# Altium PCB АСТА.758725.047_V2.PcbDoc (part 2 of 3)
Units mm, origin at the board's own origin, x right, y up, seen from the top; angles counter-clockwise.
Board outline 310 x 80 mm, 2 copper layers (Top Layer, Top, Bottom Layer, Bottom); 261 components, 259 nets, 994 pads, 414 vias.
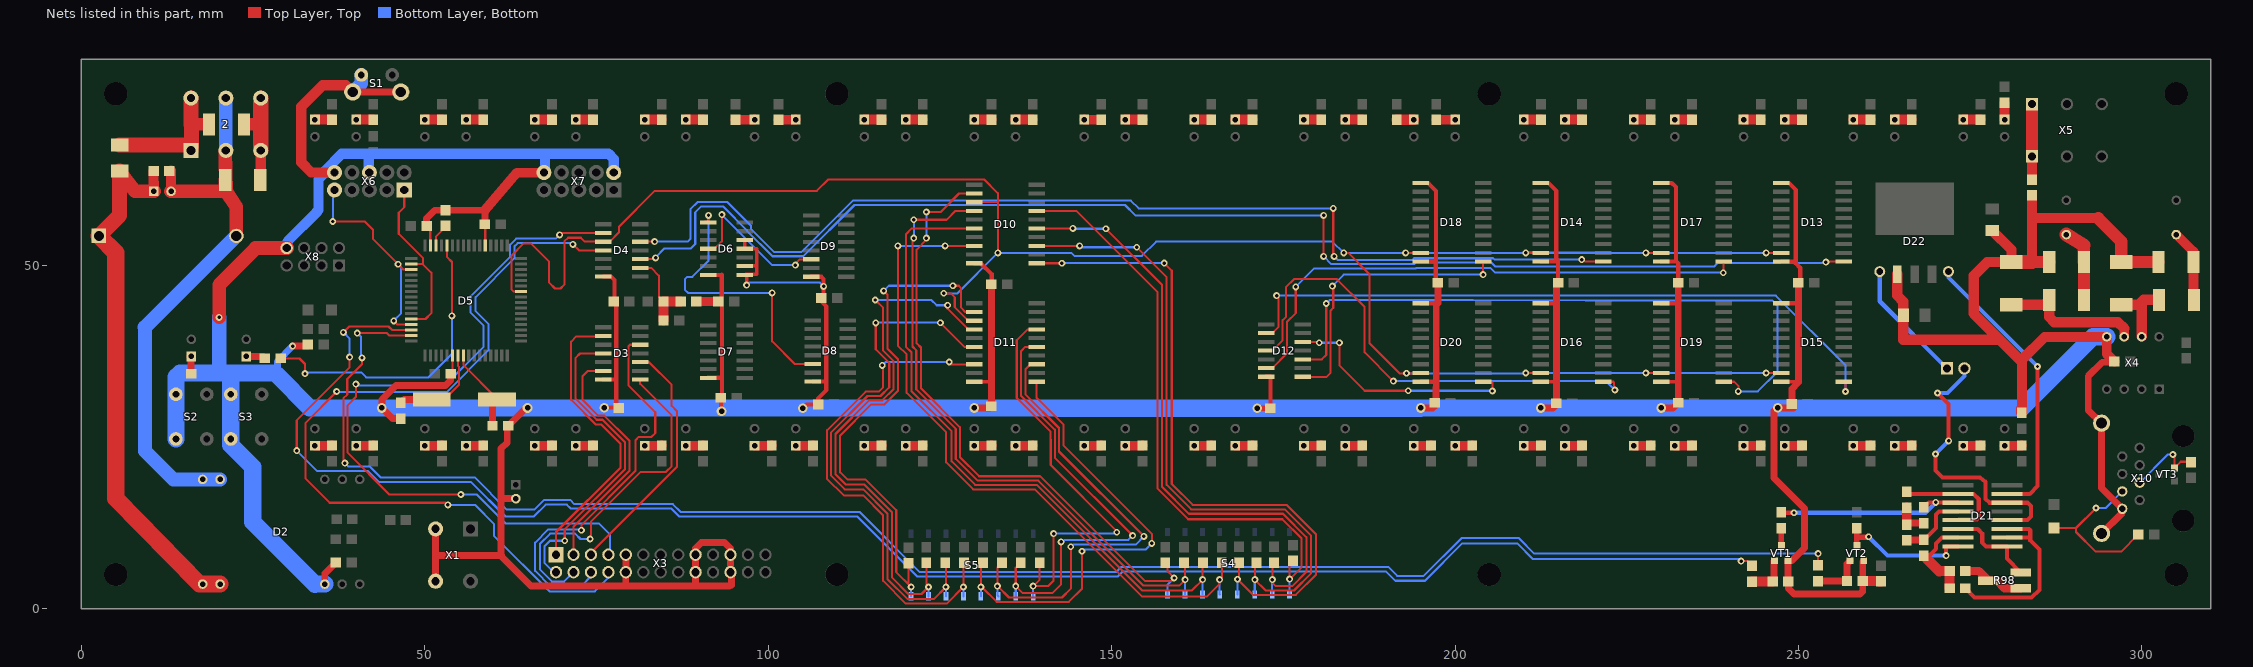
[diagram p2: the nets of this part, all layers, seen from the top]

## Via types
v1: diameter 1, hole 0.5, Top Layer, Top to Bottom Layer, Bottom, 391 vias
v2: diameter 1.016, hole 0.457, Top Layer, Top to Bottom Layer, Bottom, 12 vias
v3: diameter 1.4, hole 0.8, Top Layer, Top to Bottom Layer, Bottom, 11 vias

## Nets (pads, with @x,y where several pads share a name; then routed paths per layer and width w, separated by ;. In a path a pad name is that pad's centre, name@x,y a point inside that pad or via, vN(x,y) a via of type N, cw(c..) or ccw(c..) an arc to the next point about the centre after c; other vN are vias at no path point) (continued)
D7: D4.3 D5.42 D10.3 D11.3 D13.9 D14.9 D15.9 D16.9 D17.9 D18.9 D19.9 D20.9 | length 329.8
  Top Layer, Top w0.3: D5.42@64,46.2 62.92,46.2 62.64,46.48 62.64,51.459 64.405,53.224 65.421,53.224 68.088,50.557 68.088,47.512 68.95,46.65 69.75,46.65 70.32,47.22 70.32,53.5 70.86,54.04 72.72,54.04 73.3,53.46 D4.3@76,53.46 76.9,53.46 78.27,54.83 78.27,55.65 83.48,60.86 107.077,60.86 108.727,62.51 131.45,62.51 133.44,60.52 133.44,59.25 ; v1(125.56,45.95) 126.555,45.95 127.155,45.35 127.155,43.925 128.48,42.6 128.48,42.58 129.1,41.96 D11.3@130,41.96 ; D10.3@130,59.21 130.04,59.25 133.44,59.25 ; v1(133.44,51.84) 133.44,59.25 ; v1(183.785,51.827) 184.42,51.827 187.539,48.708 187.539,38.675 191.913,34.301 v1(192.929,34.301) 194.961,34.301 D20.9@195,34.34 ; v1(192.79,51.84) D18.9@195,51.84 ; v1(210.29,34.34) D16.9@212.5,34.34 ; v1(210.29,51.84) D14.9@212.5,51.84 ; v1(227.79,34.34) D19.9@230,34.34 ; v1(227.79,51.84) D17.9@230,51.84 ; v1(245.29,34.34) D15.9@247.5,34.34 ; v1(245.29,51.84) D13.9@247.5,51.84
  Bottom Layer, Bottom w0.3: v1(125.56,45.95) 125.57,45.94 127.55,45.94 127.55,45.95 v1(133.44,51.84) 144.11,51.84 144.56,51.39 154.39,51.39 156.472,53.472 182.14,53.472 v1(183.785,51.827) 192.777,51.827 v1(192.79,51.84) v1(210.29,51.84) 210.3,51.85 222.65,51.85 222.65,51.84 v1(227.79,51.84) v1(245.29,51.84) ; v1(192.929,34.301) 210.251,34.301 v1(210.29,34.34) v1(227.79,34.34) v1(245.29,34.34)
DE0: D3.2 X3.1 | length 43.4
  Top Layer, Top w0.3: X3.1@69.104,7.885 69.104,11.187 78.502,20.585 78.502,24.014 75.666,26.85 74.861,26.85 71.29,30.421 71.29,38.9 72.06,39.67 75.94,39.67 D3.2@76,39.73
DE1: D3.4 X3.2 | length 46
  Top Layer, Top w0.3: v1(70.374,9.917) 70.374,11.568 79.137,20.331 79.137,24.268 75.865,27.54 75.026,27.54 71.95,30.616 71.95,36.55 72.59,37.19 D3.4@76,37.19
  Bottom Layer, Bottom w0.3: X3.2@69.104,5.345 68.755,5.345 67.45,6.65 67.45,9.15 68.217,9.917 v1(70.374,9.917)
DE2: D3.6 X3.3 | length 36.1
  Top Layer, Top w0.3: X3.3@71.644,7.885 71.644,11.949 79.772,20.077 79.772,24.522 76.149,28.145 75.276,28.145 72.95,30.471 72.95,33.85 73.75,34.65 D3.6@76,34.65
DE3: D3.8 X3.4 | length 50.6
  Top Layer, Top w0.3: v1(74.057,10.171) 74.184,10.044 74.184,12.711 81.423,19.95 85.106,19.95 85.928,20.772 85.928,28.172 81.338,32.762 D3.8@81.338,33.38
  Bottom Layer, Bottom w0.3: X3.4@71.644,5.345 70.249,3.95 68.55,3.95 66.75,5.75 66.75,9.45 68.25,10.95 71.881,10.95 72.66,10.171 v1(74.057,10.171)
DE4: D3.10 X3.5 | length 36.2
  Top Layer, Top w0.3: X3.5@74.184,7.885 74.184,8.134 86.72,20.67 86.72,28.76 85.93,29.55 85.93,32.63 82.64,35.92 D3.10@81.338,35.92
DE5: D3.12 X3.6 | length 57.7
  Top Layer, Top w0.3: v1(72.787,11.441) 72.787,12.203 80.67,20.086 80.67,24.56 81.16,25.05 83,25.05 83.55,25.6 83.55,28.63 79.63,32.55 79.63,37.65 79.65,37.67 79.65,38.25 79.86,38.46 D3.12@81.338,38.46
  Bottom Layer, Bottom w0.3: v1(72.787,11.441) 72.66,11.568 67.968,11.568 66.05,9.65 66.05,5.55 68.287,3.313 72.787,3.313 74.184,4.71 X3.6@74.184,5.345
DE6: D4.2 X3.7 | length 110.1
  Top Layer, Top w0.3: v1(39.96,32.73) 39.96,30.85 38.75,29.64 38.75,22.744 44.844,16.65 v1(55.25,16.65) ; v1(69.62,54.46) 69.89,54.73 D4.2@76,54.73
  Bottom Layer, Bottom w0.3: v1(39.96,32.73) 40.34,32.73 40.34,32.5 52.86,32.5 58.55,38.19 58.55,41.25 56.67,43.13 56.67,45.52 62.43,51.28 62.43,53.03 63.3,53.9 69.06,53.9 v1(69.62,54.46) ; v1(55.25,16.65) 57.55,16.65 61.743,12.457 75.327,12.457 76.978,10.806 76.978,8.139 X3.7@76.724,7.885
DE7: D4.4 X3.8 | length 124.6
  Top Layer, Top w0.3: v1(37.15,31.65) 32.599,27.05 32.599,19.001 36.15,15.45 53.05,15.45 v1(53.35,15.15) ; v1(71.56,53.08) 72.45,52.19 D4.4@76,52.19
  Bottom Layer, Bottom w0.3: v1(37.15,31.65) 37.46,31.65 37.54,31.57 53.17,31.57 59.25,37.65 59.25,41.49 57.39,43.35 57.39,45.38 63.04,51.03 63.04,52.76 63.53,53.25 71.39,53.25 v1(71.56,53.08) ; v1(53.35,15.15) 57.3,15.15 60.1,12.35 60.1,10.6 68.15,2.55 74.75,2.55 76.724,4.524 X3.8@76.724,5.345
ES1: D5.14 R92.1 | length 256.6
  Top Layer, Top w0.3: v1(31.35,23.05) 31.35,27.46 39.05,35.16 v1(39.05,36.65) ; v1(38.15,40.25) 39.014,41.114 44.714,41.114 45.228,40.6 D5.14@48,40.6 ; v1(241.65,6.95) 242.55,6.95 R92.1@243.25,6.25
  Bottom Layer, Bottom w0.3: v1(31.35,23.05) 34.35,20.05 41.75,20.05 43.35,18.45 56.75,18.45 61.75,13.45 65.85,13.45 67.589,15.189 70.689,15.189 71.263,14.616 85.868,14.616 87.011,13.473 112.919,13.473 121.682,4.71 150.892,4.71 151.654,5.472 189.928,5.472 191.3,4.1 195.621,4.1 201.057,9.536 209.064,9.536 211.35,7.25 241.35,7.25 v1(241.65,6.95) ; v1(38.15,40.25) 39.05,39.35 v1(39.05,36.65)
ES2: D5.15 R100.2 | length 256.4
  Top Layer, Top w0.3: v1(38.37,21.22) 38.14,21.45 38.14,30.64 38.7,31.2 38.7,33.47 40.85,35.62 v1(40.85,36.55) ; v1(40.15,40.15) 44.497,40.15 44.847,39.8 D5.15@48,39.8 ; R100.2@252.85,6.336 v1(252.85,8.05)
  Bottom Layer, Bottom w0.3: v1(38.37,21.22) 38.84,20.75 41.95,20.75 43.55,19.15 57.25,19.15 61.95,14.45 65.95,14.45 67.361,15.861 71.161,15.861 71.771,15.251 86.122,15.251 87.265,14.108 113.3,14.108 122.063,5.345 150.638,5.345 151.4,6.107 190.262,6.107 191.569,4.8 195.432,4.8 200.93,10.298 209.302,10.298 211.55,8.05 v1(252.85,8.05) ; v1(40.15,40.15) 40.7,39.6 40.7,36.7 v1(40.85,36.55)
G: D5.60 R9.1 | length 44.6
  Top Layer, Top w0.3: R9.1@29,36.5 29.05,36.45 31.75,36.45 32.55,35.65 v1(32.55,34.25) ; D5.60@53.2,52.9 53.2,51.25 53.95,50.5 v1(53.95,42.65)
  Bottom Layer, Bottom w0.3: v1(32.55,34.25) 32.745,34.445 40.745,34.445 41.47,33.72 50.53,33.72 53.95,37.14 v1(53.95,42.65)
GND: C1.2 C6.2 C7.1 C8.2 C9.1 C10.2 C11.2 C12.1 C13.1 C14.1 C15.2 C16.1 C17.1 C18.1 C19.2 C20.1 C21.1 C22.1 C23.1 C24.1 C25.1 C26.1 C27.1 C28.1 C29.1 C30.1 C31.1 C32.1 C33.1 C37.1 C38.1 C39.1 D2.16 D3.7 D4.7 D5.22 D5.53 D5.63 D6.7 D6.8 D6.9 D6.11 D6.12 D7.7 D8.8 D9.8 D10.10 D11.10 D12.7 D13.1 D13.10 D14.1 D14.10 D15.1 D15.10 D16.1 D16.10 D17.1 D17.10 D18.1 D18.10 D19.1 D19.10 D20.1 D20.10 D22.1 R5.2 R93.2 R99.1 RU1.2 RU2.1 S1.1 S1.3 S1.4 S2.3 S2.4 S3.3 S3.4 VD3.1 VD4.1 VT1.2 VT2.2 X1.2 X1.3 X3.9 X3.10 X3.17 X3.18 X3.21 X3.22 X4.5 X6.6 X6.10 X7.2 X7.10 X8.8 X10.1 X10.11 X10.12 | length 1128.1
  Top Layer, Top w0.3: C1.2@32.964,38.25 C1.2@32.964,38.5 ; C14.1@53.75,34.25 54,34.5 D5.22@54,36.9
  Top Layer, Top w0.4: C16.1@50.25,55.75 50.8,55.2 D5.63@50.8,52.9 ; C17.1@58.75,56 58.8,56 D5.53@58.8,52.9
  Top Layer, Top w0.5: D6.12@96.588,53.71 D6.11@96.588,52.44 98.34,52.44 ; D6.9@96.61,49.922 96.638,49.95 98.35,49.95 ; v1(96.85,47.15) 96.85,48.368 D6.8@96.588,48.63 96.708,48.75 98.35,48.75 98.35,49.95 ; 98.35,52.45 98.35,49.95
  Top Layer, Top w0.508: D11.10@130,33.07 132.422,33.07 ; 132.5,33.148 132.422,33.07 ; 132.522,33.07 132.422,33.07 ; D16.10@212.5,33.07 214.73,33.07 214.75,33.05 ; D19.10@230,33.07 232.48,33.07 232.5,33.05 ; D15.10@247.5,33.07 249.93,33.07 250,33
  Top Layer, Top w0.6: D3.7@75.962,33.412 D3.7@75.968,33.412 ; D3.7@76,33.38 D3.7@75.968,33.412 ; D4.7@76,48.38 77.12,48.38 77.6,47.9 77.6,44.85 C13.1@77.5,44.75 77.867,44.383 77.867,33.412 ; v3(76.1,29.3) 78.1,29.3 C12.1@78.15,29.35 ; C12.1@77.972,29.25 C12.1@78.25,29.25 C12.1@78.15,29.35 ; D7.7@91.25,33.63 91.25,33.65 93.25,33.65 ; D6.7@91.25,48.63 93.212,48.63 93.234,48.652 C18.1@93.234,44.75 ; C18.1@92.75,44.75 C18.1@93.199,44.75 ; C20.1@93.15,30.7 C20.1@93.2,30.75 ; v3(93.2,28.8) 93.1,28.9 C20.1@93.1,30.75 C20.1@93.2,30.75 ; v3(105,29.2) 105.55,29.75 C21.1@107.25,29.75 107.25,30.65 108.45,31.85 108.45,33.15 ; D9.8@106.25,48.36 106.25,48.35 107.75,48.35 108.05,48.05 v1(108.05,46.95) 108.05,45.35 107.85,45.35 C22.1@107.75,45.25 107.75,44.75 108.45,44.05 108.45,33.15 ; D8.8@106.5,33.11 108.41,33.11 108.45,33.15 ; D10.10@130,50.32 130.93,50.32 132.5,48.75 132.55,48.75 132.55,47.25 C23.1@132.5,47.25 ; D12.7@172.482,33.793 173.117,33.793 C33.1@173.117,29.221 ; D20.10@195,33.07 196.971,33.07 ; D20.1@195,44.5 197.5,44.5 ; D18.10@195,50.57 197.18,50.57 ; D18.1@195,62 196.09,62 197.25,60.84 197.25,50.5 197.18,50.57 ; C30.1@197.5,47.5 197.18,47.82 197.18,50.57 ; D16.1@212.5,44.5 214.75,44.5 ; D14.10@212.5,50.57 214.88,50.57 215,50.45 ; D14.1@212.5,62 213.59,62 214.74,60.85 214.74,51.01 215,50.75 215,50.45 ; C26.1@215,47.5 215,50.45 ; D19.1@230,44.5 232.5,44.5 ; D17.10@230,50.57 232.23,50.57 ; D17.1@230,62 231.55,62 232.15,61.4 232.15,50.65 232.23,50.57 ; C29.1@232.5,47.5 232.5,50.3 232.23,50.57 ; D15.1@247.5,44.5 250,44.5 ; D13.10@247.5,50.57 247.53,50.57 247.55,50.55 249.35,50.55 249.35,50.57 249.61,50.31 ; D13.1@247.5,62 248.59,62 249.61,60.98 249.61,50.31 ; C25.1@250,47.5 250.25,47.75 250.25,49.67 249.61,50.31 ; 282.537,35.963 282.537,36.284 ; D3.7@75.968,33.412 77.867,33.412 ; 77.867,33.412 77.867,29.633 C12.1@78.15,29.35 ; C18.1@93.199,44.75 93.234,44.715 C18.1@93.234,44.75 ; C18.1@93.199,44.75 C18.1@93.234,44.75 ; C20.1@93.2,30.75 93.25,30.75 93.25,33.65 ; C18.1@93.234,44.75 93.25,44.75 93.25,33.65 ; D6.9@96.588,49.9 96.61,49.922 97.425,49.922 97.403,49.9 D6.9@96.588,49.9
  Top Layer, Top w0.7: 196.971,33.07 197.01,33.031 197.26,33.031
  Top Layer, Top w0.8: v3(171.212,29.221) C33.1@173.117,29.221
  Top Layer, Top w1: v1(30.75,38.25) C1.2@32.964,38.25 ; D2.16@35.43,3.61 35.43,5.13 C9.1@37.05,6.75 ; S1.4@39.5,75.25 S1.3@46.5,75.25 ; C11.2@46.5,27.714 45.286,27.714 v3(43.75,29.25) 43.75,30.45 45.8,32.5 53,32.5 53.75,33.25 C14.1@53.75,34.25 ; C16.1@50.25,55.75 50.25,56.85 51.436,58.036 C19.2@53,58.036 58.736,58.036 58.736,56.014 C17.1@58.75,56 ; X1.3@51.57,4.03 51.55,4.05 51.55,7.75 ; X1.2@51.57,11.65 51.55,11.65 51.55,7.75 ; 61.15,7.8 61.1,7.8 ; C8.2@63.25,16.05 61.1,16.05 ; v3(64.95,29.25) 64.736,29.25 C10.2@62.136,26.65 62,26.514 62,24.25 61.1,23.35 61.1,16.05 ; X3.9@79.264,7.885 X3.10@79.264,5.345 79.25,5.331 79.25,3.35 ; 89.35,3.55 89.424,3.624 X3.18@89.424,5.345 X3.17@89.424,7.885 89.424,8.824 90.25,9.65 93.65,9.65 94.504,8.796 X3.21@94.504,7.885 X3.22@94.504,5.345 94.65,5.199 94.65,3.45 94.55,3.55 94.35,3.35 79.25,3.35 ; v3(130,29.25) 132.25,29.25 C24.1@132.5,29.5 132.522,29.522 132.522,33.07 ; 132.5,33.148 C23.1@132.5,47.25 ; v3(195,29.25) 196.75,29.25 197.05,29.55 C32.1@197.05,30 197.25,30.2 197.25,32.25 197.26,32.26 197.26,33.031 197.26,44.26 197.5,44.5 C30.1@197.5,47.5 ; v3(212.5,29.25) 214.25,29.25 214.75,29.75 C28.1@214.75,29.95 214.75,33.05 214.75,44.5 214.75,47.25 C26.1@215,47.5 ; v3(230,29.25) 231.75,29.25 C31.1@232.5,30 232.5,33.05 232.5,44.5 C29.1@232.5,47.5 ; C25.1@250,47.5 250,44.5 250,33 249.05,32.05 C27.1@249.05,29.85 249.05,29.45 249.25,29.25 246.85,29.25 246.44,28.84 246.44,19.04 250.86,14.62 250.86,8.86 249,7 VT1.2@248.5,7 248.5,4.036 R93.2@248.536,4 248.536,2.964 249.35,2.15 258.95,2.15 259.35,2.55 R99.1@259.35,4.05 259.35,6.85 VT2.2@259.5,7 ; 279.178,39.322 279.362,39.205 279.295,39.205 ; X10.11@294.132,10.987 297.142,13.997 X10.1@297.142,14.567 294.094,17.615 294.094,27.013 X10.12@294.132,27.037 292.189,28.98 292.189,33.871 294.221,35.903 295.999,35.903 C7.1@296,36 ; 51.55,7.75 61.05,7.75 ; 61.05,7.75 61.1,7.8 ; 61.05,7.75 65.45,3.35 79.25,3.35 ; 61.1,7.8 61.1,16.05
  Top Layer, Top w1.3: C15.2@89.536,44.75 C18.1@92.75,44.75
  Top Layer, Top w1.4: X4.5@294.856,39.586 294.856,39.596 X4.5@294.88,39.62
  Top Layer, Top w1.422: 58.75,58.05 63.39,63.5 67.3,63.5 X7.10@67.34,63.54 ; R99.1@259.35,4.05 261.7,4.05 261.75,4 C37.1@262,4 ; C6.2@282.41,28.79 282.5,28.7 282.537,28.737 282.537,29.299 ; 284,56.77 R5.2@284,60.214 ; 284.008,56.25 284.008,56.758 284.01,56.76 284.01,56.923 ; X4.5@294.88,39.62 294.88,37.12 C7.1@296,36
  Top Layer, Top w1.5: X6.10@36.84,63.54 33.46,63.54 32,65 32,73.12 35.13,76.25 38.5,76.25 S1.4@39.5,75.25 ; D22.1@264.376,48.73 264.376,45.624 265.265,44.735 C38.1@265.265,42.761 265.265,39.205 279.295,39.205 ; C39.1@278.219,55.08 281.013,52.286 281.013,50.508 VD4.1@281,50.5 277.5,50.5 275.5,48.5 275.5,43 279.178,39.322 279.295,39.205 ; C6.2@282.5,28.536 282.41,28.626 282.41,28.79 282.41,29.172 282.537,29.299 282.537,35.963 279.295,39.205 ; 282.537,36.284 285.839,39.586 X4.5@294.856,39.586 ; 284,56.77 284.01,56.76 ; 284.008,50.5 284.008,56.25 ; 284.01,56.923 293.65,56.923 293.65,56.85
  Top Layer, Top w1.778: 284.008,50.5 RU2.1@286.5,50.5 ; VD3.1@297,50.5 RU1.2@302.42,50.5
  Top Layer, Top w1.8: X8.8@29.88,52.54 29.94,52.54 X8.8@29.95,52.55 ; 293.65,56.85 297,53.5 VD3.1@297,50.5
  Top Layer, Top w2: v1(20.05,42.45) 20.05,47.15 25.35,52.45 25.35,52.55 X8.8@29.95,52.55 ; VD4.1@281,50.5 284.008,50.5
  Bottom Layer, Bottom w0.3: v1(96.85,47.15) 97.22,47.52 107.48,47.52 v1(108.05,46.95)
  Bottom Layer, Bottom w1: 28.545,34.003 28.545,36.045 v1(30.75,38.25)
  Bottom Layer, Bottom w1.4: v3(76.1,29.3) 76.5,29.3 v3@76.55,29.25
  Bottom Layer, Bottom w1.5: X8.8@29.88,52.54 29.96,52.54 30,52.5 30,53.5 34.25,57.75 34.25,57.84 34.52,58.11 34.52,62.52 35.54,63.54 ; X6.10@36.84,63.54 35.54,63.54 ; X6.6@41.92,63.54 41.85,63.61 41.85,66.25 ; X7.10@67.34,63.54 67.5,63.7 67.5,66.25 ; X7.2@77.5,63.54 X7.2@77.486,63.526 ; 35.54,63.54 35.54,63.873 37.917,66.25 41.85,66.25 ; 41.85,66.25 67.5,66.25 ; 67.5,66.25 76.75,66.25 77.5,65.5 X7.2@77.486,63.526 ; X7.2@77.486,63.526 77.486,63.511 X7.2@77.486,63.526
  Bottom Layer, Bottom w2: S3.3@21.65,31.35 S3.3@21.75,31.25 S3.3@21.75,31.45 ; S1.4@39.5,75.25 40.75,76.5 S1.1@40.75,77.75
  Bottom Layer, Bottom w2.1: 20.05,34.35 v1(20.05,42.45)
  Bottom Layer, Bottom w2.5: S2.4@13.75,24.75 13.75,33.75 14.35,34.35 20.05,34.35 21.75,34.35 ; S3.3@21.75,31.25 S3.4@21.75,24.75 21.75,23.85 24.95,20.65 24.95,12.85 25.05,12.75 24.95,12.65 34.011,3.589 D2.16@35.43,3.61 ; S3.3@21.75,31.45 21.75,34.35 ; 28.545,34.003 33.25,29.25 v3(43.75,29.25) v3(64.95,29.25) 76.55,29.25 v3(130,29.25) 137.72,29.25 137.73,29.24 142.24,29.24 142.25,29.25 142.279,29.221 v3(171.212,29.221) 194.971,29.221 v3(195,29.25) v3(212.5,29.25) v3(230,29.25) 282.5,29.25 292.87,39.62 X4.5@294.88,39.62 ; 28.544,34.004 28.25,34.25 28.15,34.35 21.75,34.35
  other v3: 247,29.3
GND_P: 2.3 2.4 C2.1 C3.2 | length 14.4
  Top Layer, Top w1.5: C3.2@26.03,62.45 26.11,62.53 2.3@26.11,66.75
  Top Layer, Top w1.778: C2.1@23.65,70.55 26.11,70.55
  Top Layer, Top w2.2: 2.3@26.11,66.75 26.11,70.55 2.4@26.11,74.37
L0: D10.2 R10.1 S4.16 | length 90.8
  Top Layer, Top w0.3: v1(123.03,53.98) 123.03,53.73 121.61,52.31 121.61,38.68 122.24,38.05 122.24,32.12 127.91,26.45 127.91,22.109 130.704,19.315 139.589,19.315 154.829,4.075 158.675,4.075 v1(159.1,4.5) ; v1(123.03,57.79) 125.09,57.79 127.78,60.48 D10.2@130,60.48 ; R10.1@157.795,6.718 158.13,6.383 158.13,5.47 158.731,4.869
  Bottom Layer, Bottom w0.3: v1(123.03,53.98) v1(123.03,57.79) ; S4.16@158.131,2.097 158.131,3.531 v1(159.1,4.5)
L1: D10.4 R11.1 S4.15 | length 93
  Top Layer, Top w0.3: v1(121.19,53.98) 121,53.79 121,38.2 121.55,37.65 121.55,31.95 127.3,26.2 127.3,21.855 130.475,18.68 139.335,18.68 154.639,3.376 159.818,3.376 v1(160.7,4.258) 160.7,6.563 R11.1@160.545,6.718 ; v1(121.19,56.66) 125.98,56.66 127.27,57.95 129.99,57.95 D10.4@130,57.94
  Bottom Layer, Bottom w0.3: v1(121.19,53.98) v1(121.19,56.66) ; S4.15@160.671,2.097 160.7,2.126 v1(160.7,4.258)
L2: D10.6 R12.1 S4.14 | length 95.8
  Top Layer, Top w0.3: D10.6@130,55.4 120.92,55.4 120.03,54.51 120.03,38.17 120.85,37.35 120.85,31.69 126.69,25.85 126.69,21.474 130.119,18.045 139.081,18.045 154.448,2.678 161.65,2.678 v1(163.24,4.268) 163.24,6.663 R12.1@163.295,6.718
  Bottom Layer, Bottom w0.3: S4.14@163.211,2.097 163.24,2.126 v1(163.24,4.268)
L3: D10.8 R13.1 S4.13 | length 99.6
  Top Layer, Top w0.3: v1(118.87,52.86) 118.87,38.33 120.15,37.05 120.15,31.45 125.91,25.69 125.91,21.347 129.847,17.41 138.827,17.41 154.448,1.789 163.846,1.789 165.72,3.663 v1(165.72,4.258) 166.045,4.583 R13.1@166.045,6.718 ; v1(125.75,52.86) D10.8@130,52.86
  Bottom Layer, Bottom w0.3: v1(118.87,52.86) 118.91,52.82 125.71,52.82 v1(125.75,52.86) ; v1(165.72,4.258) 165.72,2.128 S4.13@165.751,2.097
L4: D10.11 R14.1 S4.12 | length 99.4
  Top Layer, Top w0.3: D10.11@139.088,50.32 v1(142.76,50.32) ; v1(157.65,50.35) 158.75,49.25 158.75,18.188 161.788,15.15 175.45,15.15 179.75,10.85 179.75,4.993 176.8,2.043 170.585,2.043 v1(168.32,4.308) 168.545,4.533 R14.1@168.545,6.742
  Bottom Layer, Bottom w0.3: v1(142.76,50.32) 142.79,50.35 v1(157.65,50.35) ; S4.12@168.291,2.097 168.291,4.279 v1(168.32,4.308)
L5: D10.13 R15.1 S4.11 | length 95.3
  Top Layer, Top w0.3: D10.13@139.088,52.86 v1(145.34,52.86) ; v1(153.65,52.65) 158.004,48.296 158.004,18.045 161.56,14.489 175.211,14.489 179.05,10.65 179.05,5.182 176.546,2.678 172.44,2.678 v1(170.86,4.258) 170.86,6.517 R15.1@171.085,6.742
  Bottom Layer, Bottom w0.3: v1(145.34,52.86) 145.484,52.716 145.55,52.65 v1(153.65,52.65) ; S4.11@170.831,2.097 170.831,4.229 v1(170.86,4.258)
L6: D10.15 R16.1 S4.10 | length 91.5
  Top Layer, Top w0.3: D10.15@139.088,55.4 v1(144.36,55.4) ; v1(149.15,55.35) 157.35,47.15 157.35,17.75 161.25,13.85 174.95,13.85 178.35,10.45 178.35,5.371 176.292,3.313 173.879,3.313 173.4,3.792 v1(173.4,4.268) 173.4,6.517 R16.1@173.625,6.742
  Bottom Layer, Bottom w0.3: v1(144.36,55.4) 144.47,55.51 144.597,55.383 144.63,55.35 v1(149.15,55.35) ; S4.10@173.371,2.097 173.371,4.239 v1(173.4,4.268)
L7: D10.17 R17.1 S4.9 | length 86.8
  Top Layer, Top w0.3: D10.17@139.088,57.94 144.86,57.94 156.65,46.15 156.65,17.55 161.15,13.05 174.85,13.05 177.65,10.25 177.65,6.068 v1(175.911,4.329) 175.911,6.488 R17.1@176.419,6.996
  Bottom Layer, Bottom w0.3: S4.9@175.911,2.097 175.94,2.126 175.911,2.155 v1(175.911,4.329)
L8: D11.2 R18.1 S5.16 | length 77
  Top Layer, Top w0.3: v1(116.8,46.3) 116.432,46.3 116.616,46.484 117.364,45.736 117.364,37.857 118.888,36.333 118.888,31.761 116.856,29.729 114.951,29.729 110.461,25.239 110.461,19.896 111.55,18.807 114.189,18.807 118.634,14.362 118.634,5.345 v1(120.793,3.186) 120.412,3.567 R18.1@120.412,6.615 ; v1(126.89,47.05) 127.75,47.05 128.05,46.75 128.05,43.89 128.71,43.23 D11.2@130,43.23
  Bottom Layer, Bottom w0.3: v1(116.8,46.3) 117.55,47.05 v1(126.89,47.05) ; S5.16@120.793,1.843 v1(120.793,3.186)
L9: D11.4 R19.1 S5.15 | length 79.3
  Top Layer, Top w0.3: v1(115.586,44.969) 116.729,43.826 116.729,37.603 118.253,36.079 118.253,32.015 116.602,30.364 114.697,30.364 109.792,25.459 109.792,19.62 111.3,18.112 113.995,18.112 117.999,14.108 117.999,4.583 120.412,2.17 122.317,2.17 v1(123.333,3.186) 123.016,3.503 R19.1@123.016,6.718 ; v1(126.11,44.21) 126.11,43.68 129.1,40.69 D11.4@130,40.69
  Bottom Layer, Bottom w0.3: v1(115.586,44.969) 123.75,44.969 124.509,44.21 v1(126.11,44.21) ; S5.15@123.333,1.843 v1(123.333,3.186)
L10: D11.6 R20.1 S5.14 | length 78.9
  Top Layer, Top w0.3: v1(115.65,41.65) 115.65,37.793 117.618,35.825 117.618,32.269 116.348,30.999 114.449,30.999 109.15,25.7 109.15,19.4 111.14,17.41 113.808,17.41 117.364,13.854 117.364,4.329 120.285,1.408 124.095,1.408 v1(125.873,3.186) 125.873,6.611 R20.1@125.766,6.718 ; v1(125.06,41.67) 125.06,41.64 128.55,38.15 D11.6@130,38.15
  Bottom Layer, Bottom w0.3: v1(115.65,41.65) 115.67,41.67 v1(125.06,41.67) ; S5.14@125.873,1.843 v1(125.873,3.186)
L11: D11.8 R21.1 S5.13 | length 73.7
  Top Layer, Top w0.3: v1(116.602,35.444) 116.729,35.317 116.729,32.269 116.094,31.634 114.189,31.634 108.577,26.022 108.577,25.983 108.545,25.951 108.545,18.976 111,16.521 113.808,16.521 116.729,13.6 116.729,4.075 120.031,0.773 126,0.773 v1(128.413,3.186) 128.413,6.615 R21.1@128.516,6.718 ; v1(126.35,35.95) 126.69,35.61 D11.8@130,35.61
  Bottom Layer, Bottom w0.3: v1(116.602,35.444) 117.108,35.95 v1(126.35,35.95) ; S5.13@128.413,1.843 v1(128.413,3.186)
L12: D11.11 R22.1 S5.12 | length 68
  Top Layer, Top w0.3: R22.1@131.266,6.718 130.953,6.405 v1(130.953,3.186) 131.091,3.186 133.25,1.027 143.78,1.027 145.685,2.932 v1(145.685,8.393) ; D11.11@139.088,33.07 139.088,30.712 143.018,26.782 143.018,23.76 155.845,10.933 v1(155.845,9.536)
  Bottom Layer, Bottom w0.3: S5.12@130.953,1.843 v1(130.953,3.186) ; v1(145.685,8.393) 145.939,8.647 154.956,8.647 v1(155.845,9.536)
L13: D11.13 R23.1 S5.11 | length 67.9
  Top Layer, Top w0.3: R23.1@134.016,6.718 133.366,6.068 v1(133.366,3.313) 133.399,3.313 135.05,1.662 142.764,1.662 144.05,2.948 v1(144.05,9.05) ; D11.13@139.088,35.61 138.19,35.61 137.43,34.85 137.43,31.253 142.34,26.343 142.34,22.914 v1(154.702,10.552)
  Bottom Layer, Bottom w0.3: v1(133.366,3.313) 133.366,1.97 S5.11@133.493,1.843 ; v1(144.05,9.05) 144.35,9.35 153.5,9.35 v1(154.702,10.552)
L14: D11.15 R24.1 S5.10 | length 65.8
  Top Layer, Top w0.3: R24.1@136.766,6.718 136.033,5.985 v1(136.033,3.313) 137.049,2.297 141.367,2.297 142.65,3.58 v1(142.65,9.75) ; D11.15@139.088,38.15 137.42,38.15 136.82,37.55 136.82,30.999 141.735,26.084 141.735,21.995 v1(153.051,10.679)
  Bottom Layer, Bottom w0.3: S5.10@136.033,1.843 v1(136.033,3.313) ; v1(142.65,9.75) 142.851,9.75 143.145,10.044 152.416,10.044 v1(153.051,10.679)
L15: D11.17 R25.1 S5.9 | length 62.2
  Top Layer, Top w0.3: D11.17@139.088,40.69 137.76,40.69 136.178,39.108 136.178,30.745 141.113,25.81 141.113,24.666 141.13,24.649 141.13,20.949 150.75,11.329 v1(150.75,11.15) ; R25.1@139.516,6.718 139.516,4.256 v1(138.573,3.313) 140.732,3.313 141.55,4.131 v1(141.55,10.95)
  Bottom Layer, Bottom w0.3: S5.9@138.573,1.843 v1(138.573,3.313) ; v1(141.55,10.95) 142.019,10.95 150.55,10.95 v1(150.75,11.15)
MISO: D5.3 D5.13 X6.9 | length 31.5
  Top Layer, Top w0.3: v1(36.6,56.4) 41.24,56.4 42.47,55.17 42.47,53.83 46.117,50.183 v1(46.117,50.176) 46.124,50.176 46.9,49.4 D5.3@48,49.4 ; v1(45.482,41.921) 46.003,41.4 D5.13@48,41.4
  Bottom Layer, Bottom w0.3: v1(36.6,56.4) 36.6,61 X6.9@36.84,61 ; v1(45.482,41.921) 45.482,41.986 46.56,43.064 46.56,49.733 v1(46.117,50.176)
MOSI: D5.2 D5.12 X6.1 | length 25.3
  Top Layer, Top w0.3: X6.1@47,61 47,58.488 46.202,57.69 46.202,54.61 49.71,51.102 49.71,50.2 ; D5.12@48,42.2 50.1,42.2 50.95,43.05 50.943,43.057 50.943,48.967 49.71,50.2 ; D5.2@48,50.2 49.71,50.2
N937036: BQ1.2 C11.1 D5.23 | length 13.9
  Top Layer, Top w0.3: BQ1.2@51,30.5 52.86,30.5 54.97,32.61 54.97,35.23 54.8,35.4 D5.23@54.8,36.9
  Top Layer, Top w1: C11.1@46.5,30 47,30.5 BQ1.2@51,30.5
N1740694: BQ1.1 C10.1 D5.24 | length 12.4
  Top Layer, Top w0.3: D5.24@55.6,36.9 55.6,35.52 BQ1.1@60.5,30.62
  Top Layer, Top w1: C10.1@59.85,26.65 59.85,29.85 BQ1.1@60.5,30.5
N2133179: FU2.2 L2.2 RU2.2 | length 10.9
  Top Layer, Top w1.778: 291.55,52.95 291.55,50.53 RU2.2@291.58,50.5 L2.2@291.58,45
  Top Layer, Top w2: FU2.2@289,54.5 291.55,52.95
N2133655: FU1.2 L1.2 RU1.1 | length 10.6
  Top Layer, Top w1.4: FU1.2@305,54.5 RU1.1@307.5,52
  Top Layer, Top w1.5: RU1.1@307.5,52 RU1.1@307.5,50.5 307.5,45.08 L1.2@307.58,45
N2931029: BQ2.2 D21.15 | length 41.6
  Top Layer, Top w0.6: D21.15@280.338,16.73 280.374,16.73 280.378,16.726 283.68,16.726 284.823,17.869 v2(284.823,35.268)
  Bottom Layer, Bottom w0.6: BQ2.2@271.836,49.111 271.836,48.255 v2(284.823,35.268)
N2931061: D21.12 D21.14 X9.2 | length 41.5
  Top Layer, Top w0.6: v2(269.964,22.568) 269.964,20.155 270.98,19.139 276.441,19.139 277.203,18.504 277.25,16 277.79,15.46 D21.14@280.338,15.46 283.35,15.46 283.85,14.96 283.85,13.45 283.35,12.95 283.15,12.95 D21.12@280.338,12.92 ; v2(270.218,31.458) 271.869,29.807 v2(271.869,24.473)
  Bottom Layer, Bottom w0.6: v2(269.964,22.568) v2(271.869,24.473) ; v2(270.218,31.458) 271.708,31.458 274.155,33.905 X9.2@274.155,35.014
N2931100: C35.1 D21.7 R96.1 R97.1 | length 13.5
  Top Layer, Top w0.6: R96.1@268.625,7.375 270,8.75 270,9.5 270.88,10.38 D21.7@273.25,10.38
  Top Layer, Top w1.422: R96.1@268.25,7.75 R96.1@268.625,7.375 ; 270.5,5.5 R97.1@272,5.5 C35.1@272,3
  Top Layer, Top w1.5: R96.1@268.625,7.375 270.5,5.5
N2931215: D21.6 D21.9 R98.3 | length 13.6
  Top Layer, Top w0.6: D21.6@273.25,11.65 276.1,11.65 276.75,11 276.75,9.64 277.28,9.11 D21.9@280.338,9.11 280.338,7.312 R98.3@282.35,5.3
N2932046: C34.2 D21.4 R96.2 | length 10.4
  Top Layer, Top w0.6: R96.2@268.25,10.036 270,11.786 270,13.75 270.44,14.19 D21.4@273.25,14.19
  Top Layer, Top w1: C34.2@265.75,9.964 265.822,10.036 R96.2@268.25,10.036
N2932118: C34.1 R94.1 R95.1 | length 5.1
  Top Layer, Top w1: C34.1@265.75,12.25 266,12.5 R95.1@268.25,12.5
  Top Layer, Top w1.422: C34.1@265.75,12.25 265.75,12.5 R94.1@265.75,14.75
N2932157: D21.2 D21.5 R94.2 | length 20.8
  Top Layer, Top w0.6: R94.2@265.75,17.036 266.056,16.73 D21.2@273.25,16.73 271.25,16.75 275.5,16.75 276.25,16 276.25,13.25 276,13 273.33,13 D21.5@273.25,12.92
N2932422: D21.3 R91.2 R95.2 | length 28.4
  Top Layer, Top w0.6: R91.2@247.5,14.036 247.5,14 v1(249.35,14) ; R95.2@268.25,14.786 268.964,15.5 v1(269.99,15.5) 271.75,15.5 D21.3@273.25,15.46
  Bottom Layer, Bottom w0.6: v1(249.35,14) 268.49,14 v1(269.99,15.5)
N2939062: C36.1 D21.8 VT2.3 | length 19.8
  Top Layer, Top w0.6: v1(271.5,7.75) 271.5,9.1 273.14,9.1 273.24,9.1 D21.8@273.25,9.11
  Top Layer, Top w0.8: C36.1@258.5,11.75 258.5,10.45 ; VT2.3@258.516,9.21 258.5,9.226 258.5,10.45 ; v1(260.22,10.5) 260.17,10.45 258.5,10.45
  Bottom Layer, Bottom w0.6: v1(260.22,10.5) 262.97,7.75 v1(271.5,7.75)
N3154281: C4.1 C5.1 D2.22 D2.23 VD2.1 VD6.2 | length 79.8
  Top Layer, Top w1.5: C5.1@10.5,63.75 C4.1@10.55,60.8
  Top Layer, Top w2: VD6.2@5.55,63.74 7.8,60.8 C4.1@10.55,60.8
  Top Layer, Top w2.2: VD2.1@2.55,54.3 5.55,57.3 VD6.2@5.55,63.74
  Top Layer, Top w2.5: VD2.1@2.55,54.3 5,51.85 5,16.05 17.19,3.61 D2.23@17.65,3.61 D2.22@20.19,3.61
N3295682: 2.2 2.5 C3.1 C4.2 C5.2 D2.2 D2.3 VD2.2 | length 82.9
  Top Layer, Top w1.5: C5.2@12.786,63.75 13.05,63.8 C4.2@13.05,60.8 ; 2.2@20.95,66.67 2.2@21.03,66.75
  Top Layer, Top w2: C4.2@13.05,60.8 21.05,60.8 ; C3.1@20.95,62.45 21.05,60.8 ; 2.2@20.95,66.67 21.05,60.8 ; VD2.2@22.55,54.3 22.55,58.55 21.05,60.8
  Bottom Layer, Bottom w2: 9.25,41 9.25,23 13.4,18.85 D2.2@17.65,18.85 D2.3@20.19,18.85 ; 2.2@21.03,66.75 2.5@21.03,74.37
  Bottom Layer, Bottom w2.1: 9.25,41 VD2.2@22.55,54.3
N3529322: R91.1 VT1.3 | length 2.5
  Top Layer, Top w0.8: R91.1@247.5,11.75 247.5,9.226 VT1.3@247.516,9.21
N3538170: D6.1 D8.6 | length 42.2
  Top Layer, Top w0.3: D6.1@91.25,56.25 90.64,56.25 90.805,56.415 91.3,56.415 v1(91.3,57.3) ; v1(100.56,46.01) 100.56,38.95 103.86,35.65 D8.6@106.5,35.65
  Bottom Layer, Bottom w0.3: v1(91.3,57.3) 91.3,50.71 88.94,48.35 88.2,48.35 87.86,48.01 87.86,46.46 88.31,46.01 v1(100.56,46.01)
N3540170: D6.4 D9.6 | length 22.8
  Top Layer, Top w0.3: D6.4@91.25,52.44 92.15,52.44 93.24,53.53 v1(93.24,57.41) ; v1(103.95,50.05) 103.95,50.25 104.6,50.9 D9.6@106.25,50.9
  Bottom Layer, Bottom w0.3: v1(93.24,57.41) 100.6,50.05 v1(103.95,50.05)
N3558432: C15.1 D4.9 R6.1 R7.1 | length 12.5
  Top Layer, Top w0.3: D4.9@81.338,49.65 82.95,49.65 84.082,48.518 84.082,45.417 R7.1@84.75,44.75
  Top Layer, Top w1.422: R6.1@84.75,42 R7.1@84.75,44.75 C15.1@87.25,44.75
N3625602: HL3.2 R27.2 | length 2.5
  Top Layer, Top w1.4: HL3.2@280,71.25 R27.2@280,73.714
N3626488: HL11.2 R28.2 | length 2.5
  Top Layer, Top w1.4: HL11.2@274,71.25 R28.2@276.5,71.25
  Top Layer, Top w1.422: R28.2@276.5,71.214 R28.2@276.5,71.25
N3626539: HL4.2 R29.2 | length 2.5
  Top Layer, Top w1.4: HL4.2@264,71.25 R29.2@266.5,71.25
  Top Layer, Top w1.422: R29.2@266.5,71.214 R29.2@266.5,71.25
N3626554: HL12.2 R30.2 | length 2.5
  Top Layer, Top w1.4: HL12.2@258,71.25 R30.2@260.5,71.25
  Top Layer, Top w1.422: R30.2@260.5,71.214 R30.2@260.5,71.25
N3626617: HL5.2 R31.2 | length 2.5
  Top Layer, Top w1.4: HL5.2@248,71.25 R31.2@250.5,71.25
  Top Layer, Top w1.422: R31.2@250.5,71.214 R31.2@250.5,71.25
N3626656: HL13.2 R32.2 | length 2.5
  Top Layer, Top w1.4: HL13.2@242,71.25 R32.2@244.5,71.25
  Top Layer, Top w1.422: R32.2@244.5,71.214 R32.2@244.5,71.25
N3626671: HL6.2 R33.2 | length 2.5
  Top Layer, Top w1.4: HL6.2@232,71.25 R33.2@234.5,71.25
  Top Layer, Top w1.422: R33.2@234.5,71.214 R33.2@234.5,71.25
N3626710: HL14.2 R34.2 | length 2.5
  Top Layer, Top w1.4: HL14.2@226,71.25 R34.2@228.5,71.25
  Top Layer, Top w1.422: R34.2@228.5,71.214 R34.2@228.5,71.25
N3626749: HL7.2 R35.2 | length 2.5
  Top Layer, Top w1.4: HL7.2@216,71.25 R35.2@218.5,71.25
  Top Layer, Top w1.422: R35.2@218.5,71.214 R35.2@218.5,71.25
N3626811: HL9.2 R39.2 | length 2.5
  Top Layer, Top w1.4: HL9.2@184,71.25 R39.2@186.5,71.25
  Top Layer, Top w1.422: R39.2@186.5,71.214 R39.2@186.5,71.25
N3626825: HL8.2 R37.2 | length 2.8
  Top Layer, Top w1.4: HL8.2@199.964,71.214 HL8.2@200,71.25
  Top Layer, Top w1.422: R37.2@197.25,71.214 HL8.2@199.964,71.214
N3626839: HL17.2 R40.2 | length 2.5
  Top Layer, Top w1.4: HL17.2@178,71.25 R40.2@180.5,71.25
  Top Layer, Top w1.422: R40.2@180.5,71.214 R40.2@180.5,71.25
N3626877: HL15.2 R36.2 | length 2.5
  Top Layer, Top w1.4: HL15.2@210,71.25 R36.2@212.5,71.25
  Top Layer, Top w1.422: R36.2@212.5,71.214 R36.2@212.5,71.25
N3626963: HL18.2 R42.2 | length 2.5
  Top Layer, Top w1.4: HL18.2@162,71.25 R42.2@164.5,71.25
  Top Layer, Top w1.422: R42.2@164.5,71.214 R42.2@164.5,71.25
N3626977: HL10.2 R41.2 | length 2.5
  Top Layer, Top w1.4: HL10.2@168,71.25 R41.2@170.5,71.25
  Top Layer, Top w1.422: R41.2@170.5,71.214 R41.2@170.5,71.25
N3626991: HL16.2 R38.2 | length 2.5
  Top Layer, Top w1.4: HL16.2@193.98,71.23 HL16.2@194,71.25
  Top Layer, Top w1.422: R38.2@191.5,71.214 R38.2@191.5,71.23
  Top Layer, Top w1.5: R38.2@191.5,71.23 HL16.2@193.98,71.23
N3627061: HL34.2 R58.2 | length 2.5
  Top Layer, Top w1.4: HL34.2@34,71.25 R58.2@36.5,71.25
  Top Layer, Top w1.422: R58.2@36.5,71.214 R58.2@36.5,71.25
N3627075: HL19.2 R43.2 | length 2.5
  Top Layer, Top w1.4: HL19.2@152,71.25 R43.2@154.5,71.25
  Top Layer, Top w1.422: R43.2@154.5,71.214 R43.2@154.5,71.25
N3627089: HL25.2 R55.2 | length 2.5
  Top Layer, Top w1.4: HL25.2@56,71.25 R55.2@58.5,71.25
  Top Layer, Top w1.422: R55.2@58.5,71.214 R55.2@58.5,71.25
N3627175: HL21.2 R47.2 | length 2.5
  Top Layer, Top w1.4: HL21.2@120,71.25 R47.2@122.5,71.25
  Top Layer, Top w1.422: R47.2@122.5,71.214 R47.2@122.5,71.25
N3627189: HL20.2 R45.2 | length 2.5
  Top Layer, Top w1.4: HL20.2@136,71.25 R45.2@138.5,71.25
  Top Layer, Top w1.422: R45.2@138.5,71.214 R45.2@138.5,71.25
N3627203: HL24.2 R53.2 | length 2.5
  Top Layer, Top w1.4: HL24.2@72,71.25 R53.2@74.5,71.25
  Top Layer, Top w1.422: R53.2@74.5,71.214 R53.2@74.5,71.25
N3627217: HL29.2 R48.2 | length 2.5
  Top Layer, Top w1.4: HL29.2@114,71.25 R48.2@116.5,71.25
  Top Layer, Top w1.422: R48.2@116.5,71.214 R48.2@116.5,71.25
N3627255: HL27.2 R44.2 | length 2.5
  Top Layer, Top w1.4: HL27.2@146,71.25 HL27.2@146.036,71.214
  Top Layer, Top w1.422: HL27.2@146.036,71.214 R44.2@148.5,71.214
N3627293: HL23.2 R51.2 | length 2.5
  Top Layer, Top w1.4: HL23.2@88,71.25 R51.2@90.5,71.25
  Top Layer, Top w1.422: R51.2@90.5,71.214 R51.2@90.5,71.25
N3627331: HL26.2 R57.2 | length 2.5
  Top Layer, Top w1.4: HL26.2@40,71.25 R57.2@42.5,71.25
  Top Layer, Top w1.422: R57.2@42.5,71.214 R57.2@42.5,71.25
N3627445: HL30.2 R50.2 | length 2.8
  Top Layer, Top w1.4: HL30.2@97.964,71.214 HL30.2@98,71.25
  Top Layer, Top w1.422: R50.2@95.25,71.214 HL30.2@97.964,71.214
N3627459: HL32.2 R54.2 | length 2.5
  Top Layer, Top w1.4: HL32.2@66,71.25 R54.2@68.5,71.25
  Top Layer, Top w1.422: R54.2@68.5,71.214 R54.2@68.5,71.25
N3627473: HL31.2 R52.2 | length 2.5
  Top Layer, Top w1.4: HL31.2@82,71.25 R52.2@84.5,71.25
  Top Layer, Top w1.422: R52.2@84.5,71.214 R52.2@84.5,71.25
N3627487: HL33.2 R56.2 | length 2.5
  Top Layer, Top w1.4: HL33.2@50,71.25 R56.2@52.5,71.25
  Top Layer, Top w1.422: R56.2@52.5,71.214 R56.2@52.5,71.25
N3627501: HL22.2 R49.2 | length 2.5
  Top Layer, Top w1.4: HL22.2@103.964,71.214 HL22.2@104,71.25
  Top Layer, Top w1.422: R49.2@101.5,71.214 HL22.2@103.964,71.214
N3627539: HL28.2 R46.2 | length 2.5
  Top Layer, Top w1.4: HL28.2@130,71.25 R46.2@132.5,71.25
  Top Layer, Top w1.422: R46.2@132.5,71.214 R46.2@132.5,71.25
N3628917: HL35.2 R59.2 | length 2.5
  Top Layer, Top w1.4: HL35.2@280,23.75 R59.2@282.5,23.75
  Top Layer, Top w1.422: R59.2@282.5,23.75 R59.2@282.5,23.786
N3628933: HL49.2 R72.2 | length 2.5
  Top Layer, Top w1.4: HL49.2@178,23.75 R72.2@180.5,23.75
  Top Layer, Top w1.422: R72.2@180.5,23.75 R72.2@180.5,23.786
N3629025: HL37.2 R63.2 | length 2.5
  Top Layer, Top w1.4: HL37.2@248,23.75 R63.2@250.5,23.75
  Top Layer, Top w1.422: R63.2@250.5,23.75 R63.2@250.5,23.786
N3629091: HL47.2 R68.2 | length 2.5
  Top Layer, Top w1.4: HL47.2@210,23.75 R68.2@212.5,23.75
  Top Layer, Top w1.422: R68.2@212.5,23.75 R68.2@212.5,23.786
N3629105: HL50.2 R74.2 | length 2.5
  Top Layer, Top w1.4: HL50.2@162,23.75 R74.2@164.5,23.75
  Top Layer, Top w1.422: R74.2@164.5,23.75 R74.2@164.5,23.786
N3629193: HL46.2 R66.2 | length 2.5
  Top Layer, Top w1.4: HL46.2@226,23.75 R66.2@228.5,23.75
  Top Layer, Top w1.422: R66.2@228.5,23.75 R66.2@228.5,23.786
N3629211: HL36.2 R61.2 | length 2.5
  Top Layer, Top w1.4: HL36.2@264,23.75 R61.2@266.5,23.75
  Top Layer, Top w1.422: R61.2@266.5,23.75 R61.2@266.5,23.786
N3629227: HL43.2 R60.2 | length 2.5
  Top Layer, Top w1.4: HL43.2@274,23.75 R60.2@276.5,23.75
  Top Layer, Top w1.422: R60.2@276.5,23.75 R60.2@276.5,23.786
N3629245: HL44.2 R62.2 | length 2.5
  Top Layer, Top w1.4: HL44.2@258,23.75 R62.2@260.5,23.75
  Top Layer, Top w1.422: R62.2@260.5,23.75 R62.2@260.5,23.786
N3629259: HL38.2 R65.2 | length 2.5
  Top Layer, Top w1.4: HL38.2@232,23.75 R65.2@234.5,23.75
  Top Layer, Top w1.422: R65.2@234.5,23.75 R65.2@234.5,23.786
N3629353: HL45.2 R64.2 | length 2.5
  Top Layer, Top w1.4: HL45.2@242,23.75 R64.2@244.5,23.75
  Top Layer, Top w1.422: R64.2@244.5,23.75 R64.2@244.5,23.786
N3629399: HL39.2 R67.2 | length 2.5
  Top Layer, Top w1.4: HL39.2@216,23.75 R67.2@218.25,23.75
  Top Layer, Top w1.422: R67.2@218.25,23.75 R67.2@218.5,23.786
N3629415: HL42.2 R73.2 | length 2.5
  Top Layer, Top w1.4: HL42.2@168,23.75 R73.2@170.5,23.75
  Top Layer, Top w1.422: R73.2@170.5,23.75 R73.2@170.5,23.786
N3629455: HL48.2 R70.2 | length 2.5
  Top Layer, Top w1.4: HL48.2@194,23.75 R70.2@196.5,23.75
  Top Layer, Top w1.422: R70.2@196.5,23.75 R70.2@196.5,23.786
N3629471: HL41.2 R71.2 | length 2.5
  Top Layer, Top w1.4: HL41.2@184,23.75 R71.2@186.5,23.75
  Top Layer, Top w1.422: R71.2@186.5,23.75 R71.2@186.5,23.786
N3629489: HL40.2 R69.2 | length 2.5
  Top Layer, Top w1.4: HL40.2@200,23.75 R69.2@202.25,23.75
  Top Layer, Top w1.422: R69.2@202.25,23.75 R69.2@202.5,23.786
N3764364: R99.2 R100.1 VT2.1 | length 7.3
  Top Layer, Top w1: R100.1@252.85,4.05 R99.2@257.064,4.05 257.064,6.564 VT2.1@257.5,7
N3807323: R97.2 R98.1 R98.2 | length 9.1
  Top Layer, Top w1.2: R97.2@274.286,5.5 276.25,5.5 R98.2@277.65,4.1 278.9,4.1 280,3 R98.1@282.35,3
N3807483: C35.2 D21.10 D21.11 | length 28
  Top Layer, Top w0.6: C35.2@274.286,3 275.646,1.64 283.95,1.64 285.07,2.76 285.07,8.66 283.75,9.98 283.75,10.45 ; D21.10@280.338,10.38 283.68,10.38 283.75,10.45 ; D21.11@280.338,11.65 283.55,11.65 283.75,11.45 283.75,10.45
N3812570: R92.2 R93.1 VT1.1 | length 6.3
  Top Layer, Top w1: R93.1@246.25,4 246.45,4 246.45,6.75 246.45,6.95 VT1.1@246.5,7
  Top Layer, Top w1.422: R92.2@243.25,3.964 243.25,4 R93.1@246.25,4
N3826530: HL59.2 R76.2 | length 2.5
  Top Layer, Top w1.4: HL59.2@146,23.75 R76.2@148.5,23.75
  Top Layer, Top w1.422: R76.2@148.5,23.75 R76.2@148.5,23.786
N3826726: HL60.2 R78.2 | length 2.5
  Top Layer, Top w1.4: HL60.2@130,23.75 R78.2@132.25,23.75
  Top Layer, Top w1.422: R78.2@132.25,23.75 R78.2@132.5,23.786
N3826922: HL61.2 R80.2 | length 2.5
  Top Layer, Top w1.4: HL61.2@114,23.75 R80.2@116.5,23.75
  Top Layer, Top w1.422: R80.2@116.5,23.75 R80.2@116.5,23.786
N3827118: HL62.2 R82.2 | length 2.5
  Top Layer, Top w1.4: HL62.2@98,23.75 R82.2@100.5,23.75
  Top Layer, Top w1.422: R82.2@100.5,23.75 R82.2@100.5,23.786
N3827314: HL63.2 R84.2 | length 2.5
  Top Layer, Top w1.4: HL63.2@82,23.75 R84.2@84.5,23.75
  Top Layer, Top w1.422: R84.2@84.5,23.75 R84.2@84.5,23.786
N3827510: HL64.2 R86.2 | length 2.5
  Top Layer, Top w1.4: HL64.2@66,23.75 R86.2@68.5,23.75
  Top Layer, Top w1.422: R86.2@68.5,23.75 R86.2@68.5,23.786
N3827706: HL65.2 R88.2 | length 2.5
  Top Layer, Top w1.4: HL65.2@50,23.75 R88.2@52.5,23.75
  Top Layer, Top w1.422: R88.2@52.5,23.75 R88.2@52.5,23.786
N3827902: HL66.2 R90.2 | length 2.5
  Top Layer, Top w1.4: HL66.2@34,23.75 R90.2@36.5,23.75
  Top Layer, Top w1.422: R90.2@36.5,23.75 R90.2@36.5,23.786
N5505893: L1.1 VD3.2 X4.7 | length 10.9
  Top Layer, Top w1.4: X4.7@299.96,39.62 X4.7@300,39.66
  Top Layer, Top w1.5: VD3.2@297,44.3 299.55,44.3 300,44.75 ; X4.7@300,39.66 300,44.75 ; L1.1@302.5,45 300.25,45 300,44.75
N5506024: L2.1 VD4.2 X4.6 | length 21.1
  Top Layer, Top w1.4: X4.6@297.42,39.62 297.42,40.83
  Top Layer, Top w1.5: VD4.2@281,44.3 285.8,44.3 L2.1@286.5,45 286.5,42.5 287.25,41.75 296.5,41.75 297.42,40.83
N5526864: R5.1 X5.1 X5.4 | length 11
  Top Layer, Top w1.422: R5.1@284,62.5 X5.4@284,65.88
  Top Layer, Top w1.8: X5.4@284,65.88 X5.1@284,73.5
N5566852: C19.1 D5.62 | length 3.4
  Top Layer, Top w0.3: D5.62@51.6,52.9 51.6,54.18 53,55.58 C19.1@53,55.75
N17572691: HL2.2 R9.2 | length 2.8
  Top Layer, Top w1: HL2.2@24,36.75 26.464,36.75 R9.2@26.714,36.5
N29115520: HL1.2 R8.2 | length 2.5
  Top Layer, Top w1: R8.2@15.964,34.25 HL1.2@15.964,36.714
  Top Layer, Top w1.4: HL1.2@15.964,36.714 HL1.2@16,36.75
N29304130: BQ2.1 X9.1 | length 18.1
  Bottom Layer, Bottom w0.6: BQ2.1@261.836,49.111 261.836,44.793 X9.1@271.615,35.014
N35015438: D4.12 D14.11 | length 159.5
  Top Layer, Top w0.3: D4.12@81.338,53.46 81.356,53.478 v1(83.455,53.478) ; v1(182.261,58.304) 182.261,51.446 v1(182.388,51.319) ; v1(218.45,50.85) 218.66,50.85 218.94,50.57 D14.11@221.588,50.57
  Bottom Layer, Bottom w0.3: v1(83.455,53.478) 88.29,53.478 88.662,53.85 88.662,58.162 89.749,59.249 94.021,59.249 97.52,55.75 97.52,55.3 100.87,51.95 104.83,51.95 112.327,59.447 152.803,59.447 153.946,58.304 v1(182.261,58.304) ; v1(182.388,51.319) 182.907,50.8 193.79,50.8 194.04,51.05 205.55,51.05 205.75,50.85 v1(218.45,50.85)
N35018958: D12.4 D16.11 | length 72.7
  Top Layer, Top w0.3: D12.4@172.482,37.603 173.371,37.603 174.895,39.127 174.895,42.048 175.403,42.556 175.403,46.874 176.546,48.017 182.769,48.017 186.833,43.953 186.833,37.349 v1(191.024,33.158) ; D16.11@221.588,33.07 223.03,33.07 223.15,32.95 223.15,31.98 v1(223.26,31.87)
  Bottom Layer, Bottom w0.3: v1(191.024,33.158) 191.002,33.158 191.024,33.18 221.95,33.18 v1(223.26,31.87)
N35025258: D4.10 D13.11 | length 196
  Top Layer, Top w0.3: D4.10@81.338,50.92 83.32,50.92 83.5,51.1 v1(83.6,51.1) ; v1(180.864,51.319) v1(180.864,57.288) ; v1@254.25,50.5 v1(254,50.5) 254.07,50.57 D13.11@256.588,50.57
  Bottom Layer, Bottom w0.3: v1(83.6,51.1) 83.6,51.2 84.9,52.5 88.751,52.5 89.37,53.119 89.37,57.742 90.186,58.558 93.488,58.558 96.89,55.156 96.89,55.07 100.62,51.34 105.08,51.34 112.552,58.812 151.938,58.812 153.462,57.288 v1(180.864,57.288) ; v1(180.864,51.319) 181.988,50.195 194.041,50.195 194.285,50.44 205.26,50.44 205.85,49.85 237.75,49.85 238.055,50.155 238.055,50.245 238.16,50.35 254.33,50.35 254.18,50.5 v1(254,50.5)
N35028878: D12.2 D15.11 | length 99.2
  Top Layer, Top w0.3: D12.2@172.482,40.143 173.371,40.143 174.26,41.032 174.26,45.35 v1(174.006,45.604) ; D15.11@256.588,33.07 256.85,32.808 v1(256.85,31.65)
  Bottom Layer, Bottom w0.3: v1(174.006,45.604) 246.696,45.604 256.85,35.45 v1(256.85,31.65)
N35145428: D12.10 D19.11 | length 97.1
  Top Layer, Top w0.3: D12.10@177.82,36.333 180.61,36.333 181.245,36.968 v1(181.245,44.461) ; D19.11@239.088,33.07 240.63,33.07 241.24,32.46 v1(241.24,31.67)
  Bottom Layer, Bottom w0.3: v1(181.245,44.461) 181.731,44.947 202.572,44.947 218.987,44.931 246.169,44.931 246.95,44.15 246.95,34.55 244.07,31.67 v1(241.24,31.67)
N35146468: D12.8 D18.11 | length 41.7
  Top Layer, Top w0.3: D12.8@177.82,33.793 181.293,33.793 181.88,34.38 181.88,43.445 182.261,43.826 182.261,46.874 v1(182.134,47.001) ; D18.11@204.088,50.57 204.088,48.672 v1(204.09,48.67)
  Bottom Layer, Bottom w0.3: v1(182.134,47.001) 183.789,48.656 204.076,48.656 v1(204.09,48.67)
N35150388: D12.6 D17.11 | length 79.4
  Top Layer, Top w0.3: D12.6@172.482,35.063 173.371,35.063 175.53,37.222 175.53,41.794 176.8,43.064 v1(176.8,46.874) ; v1(239.05,48.95) 239.05,49.154 239.088,49.192 D17.11@239.088,50.57
  Bottom Layer, Bottom w0.3: v1(176.8,46.874) 179.516,49.59 194.291,49.59 194.351,49.65 205.15,49.65 205.85,48.95 v1(239.05,48.95)
N35217471: HL54.2 R81.2 | length 2.5
  Top Layer, Top w1.4: HL54.2@104,23.75 R81.2@106.5,23.75
  Top Layer, Top w1.422: R81.2@106.5,23.75 R81.2@106.5,23.786
N35217751: HL56.2 R85.2 | length 2.5
  Top Layer, Top w1.4: HL56.2@72,23.75 R85.2@74.5,23.75
  Top Layer, Top w1.422: R85.2@74.5,23.75 R85.2@74.5,23.786
N35218371: HL57.2 R87.2 | length 2.5
  Top Layer, Top w1.4: HL57.2@56,23.75 R87.2@58.25,23.75
  Top Layer, Top w1.422: R87.2@58.25,23.75 R87.2@58.5,23.786
N35219611: HL53.2 R79.2 | length 2.5
  Top Layer, Top w1.4: HL53.2@120,23.75 R79.2@122.5,23.75
  Top Layer, Top w1.422: R79.2@122.5,23.75 R79.2@122.5,23.786
N35220731: HL55.2 R83.2 | length 2.5
  Top Layer, Top w1.4: HL55.2@88,23.75 R83.2@90.5,23.75
  Top Layer, Top w1.422: R83.2@90.5,23.75 R83.2@90.5,23.786
N35221191: HL52.2 R77.2 | length 2.5
  Top Layer, Top w1.4: HL52.2@136,23.75 R77.2@138.25,23.75
  Top Layer, Top w1.422: R77.2@138.25,23.75 R77.2@138.5,23.786
N35221431: HL58.2 R89.2 | length 2.5
  Top Layer, Top w1.4: HL58.2@40,23.75 R89.2@42.25,23.75
  Top Layer, Top w1.422: R89.2@42.25,23.75 R89.2@42.5,23.786
N35223231: HL51.2 R75.2 | length 2.5
  Top Layer, Top w1.4: HL51.2@152,23.75 R75.2@154.5,23.75
  Top Layer, Top w1.422: R75.2@154.5,23.75 R75.2@154.5,23.786
N36048818: D12.12 D20.11 | length 35.2
  Top Layer, Top w0.3: D12.12@177.82,38.873 180.102,38.873 v1(180.229,38.746) ; v1(183.15,38.746) 183.15,35.45 186.839,31.761 v1(193.183,31.761) ; D20.11@204.088,33.07 204.208,32.95 205.45,32.95 205.44,32.94 v1(205.44,31.72)
  Bottom Layer, Bottom w0.3: v1(180.229,38.746) v1(183.15,38.746) ; v1(193.183,31.761) 205.399,31.761 v1(205.44,31.72)
NET00000: 2.1 2.6 C2.2 VD6.1 | length 20.7
  Top Layer, Top w1.778: 15.95,70.55 16.05,70.55 C2.2@18.57,70.55
  Top Layer, Top w2.2: VD6.1@5.55,67.55 2.1@16.05,67.55 ; 2.1@15.95,66.75 2.1@16.05,67.55 ; 15.95,70.55 2.6@15.95,74.37 ; 16.05,70.55 2.1@16.05,67.55
NET00001: R101.2 VD5.2 X10.3 | length 24
  Top Layer, Top w0.3: VD5.2@287.213,11.78 287.22,11.773 290.411,11.773 ; v2(293.332,14.694) 290.411,11.773 ; R101.2@299.48,10.849 296.975,8.344 293.256,8.344 290.411,11.189 290.411,11.773
  Bottom Layer, Bottom w0.3: v2(293.332,14.694) 294.729,14.694 X10.3@297.142,17.107
NET00002: R103.2 VT3.2 X10.4 | length 11.5
  Top Layer, Top w0.3: v2(304.5,22.5) 304.5,22.322 304.635,22.187 304.762,22.187 VT3.2@304.762,20.536 305.651,21.425 307.175,21.425 R103.2@307.14,21.373
  Bottom Layer, Bottom w0.3: X10.4@299.682,18.377 303.805,22.5 v2(304.5,22.5)